# Altium PCB STM32.PcbDoc (part 10 of 10)
Units mil, origin at the board's own origin, x right, y up, seen from the top; angles counter-clockwise.
Board outline 3925 x 3925 mil, 2 copper layers (Top Layer, Bottom Layer); 152 components, 142 nets, 670 pads, 189 vias.
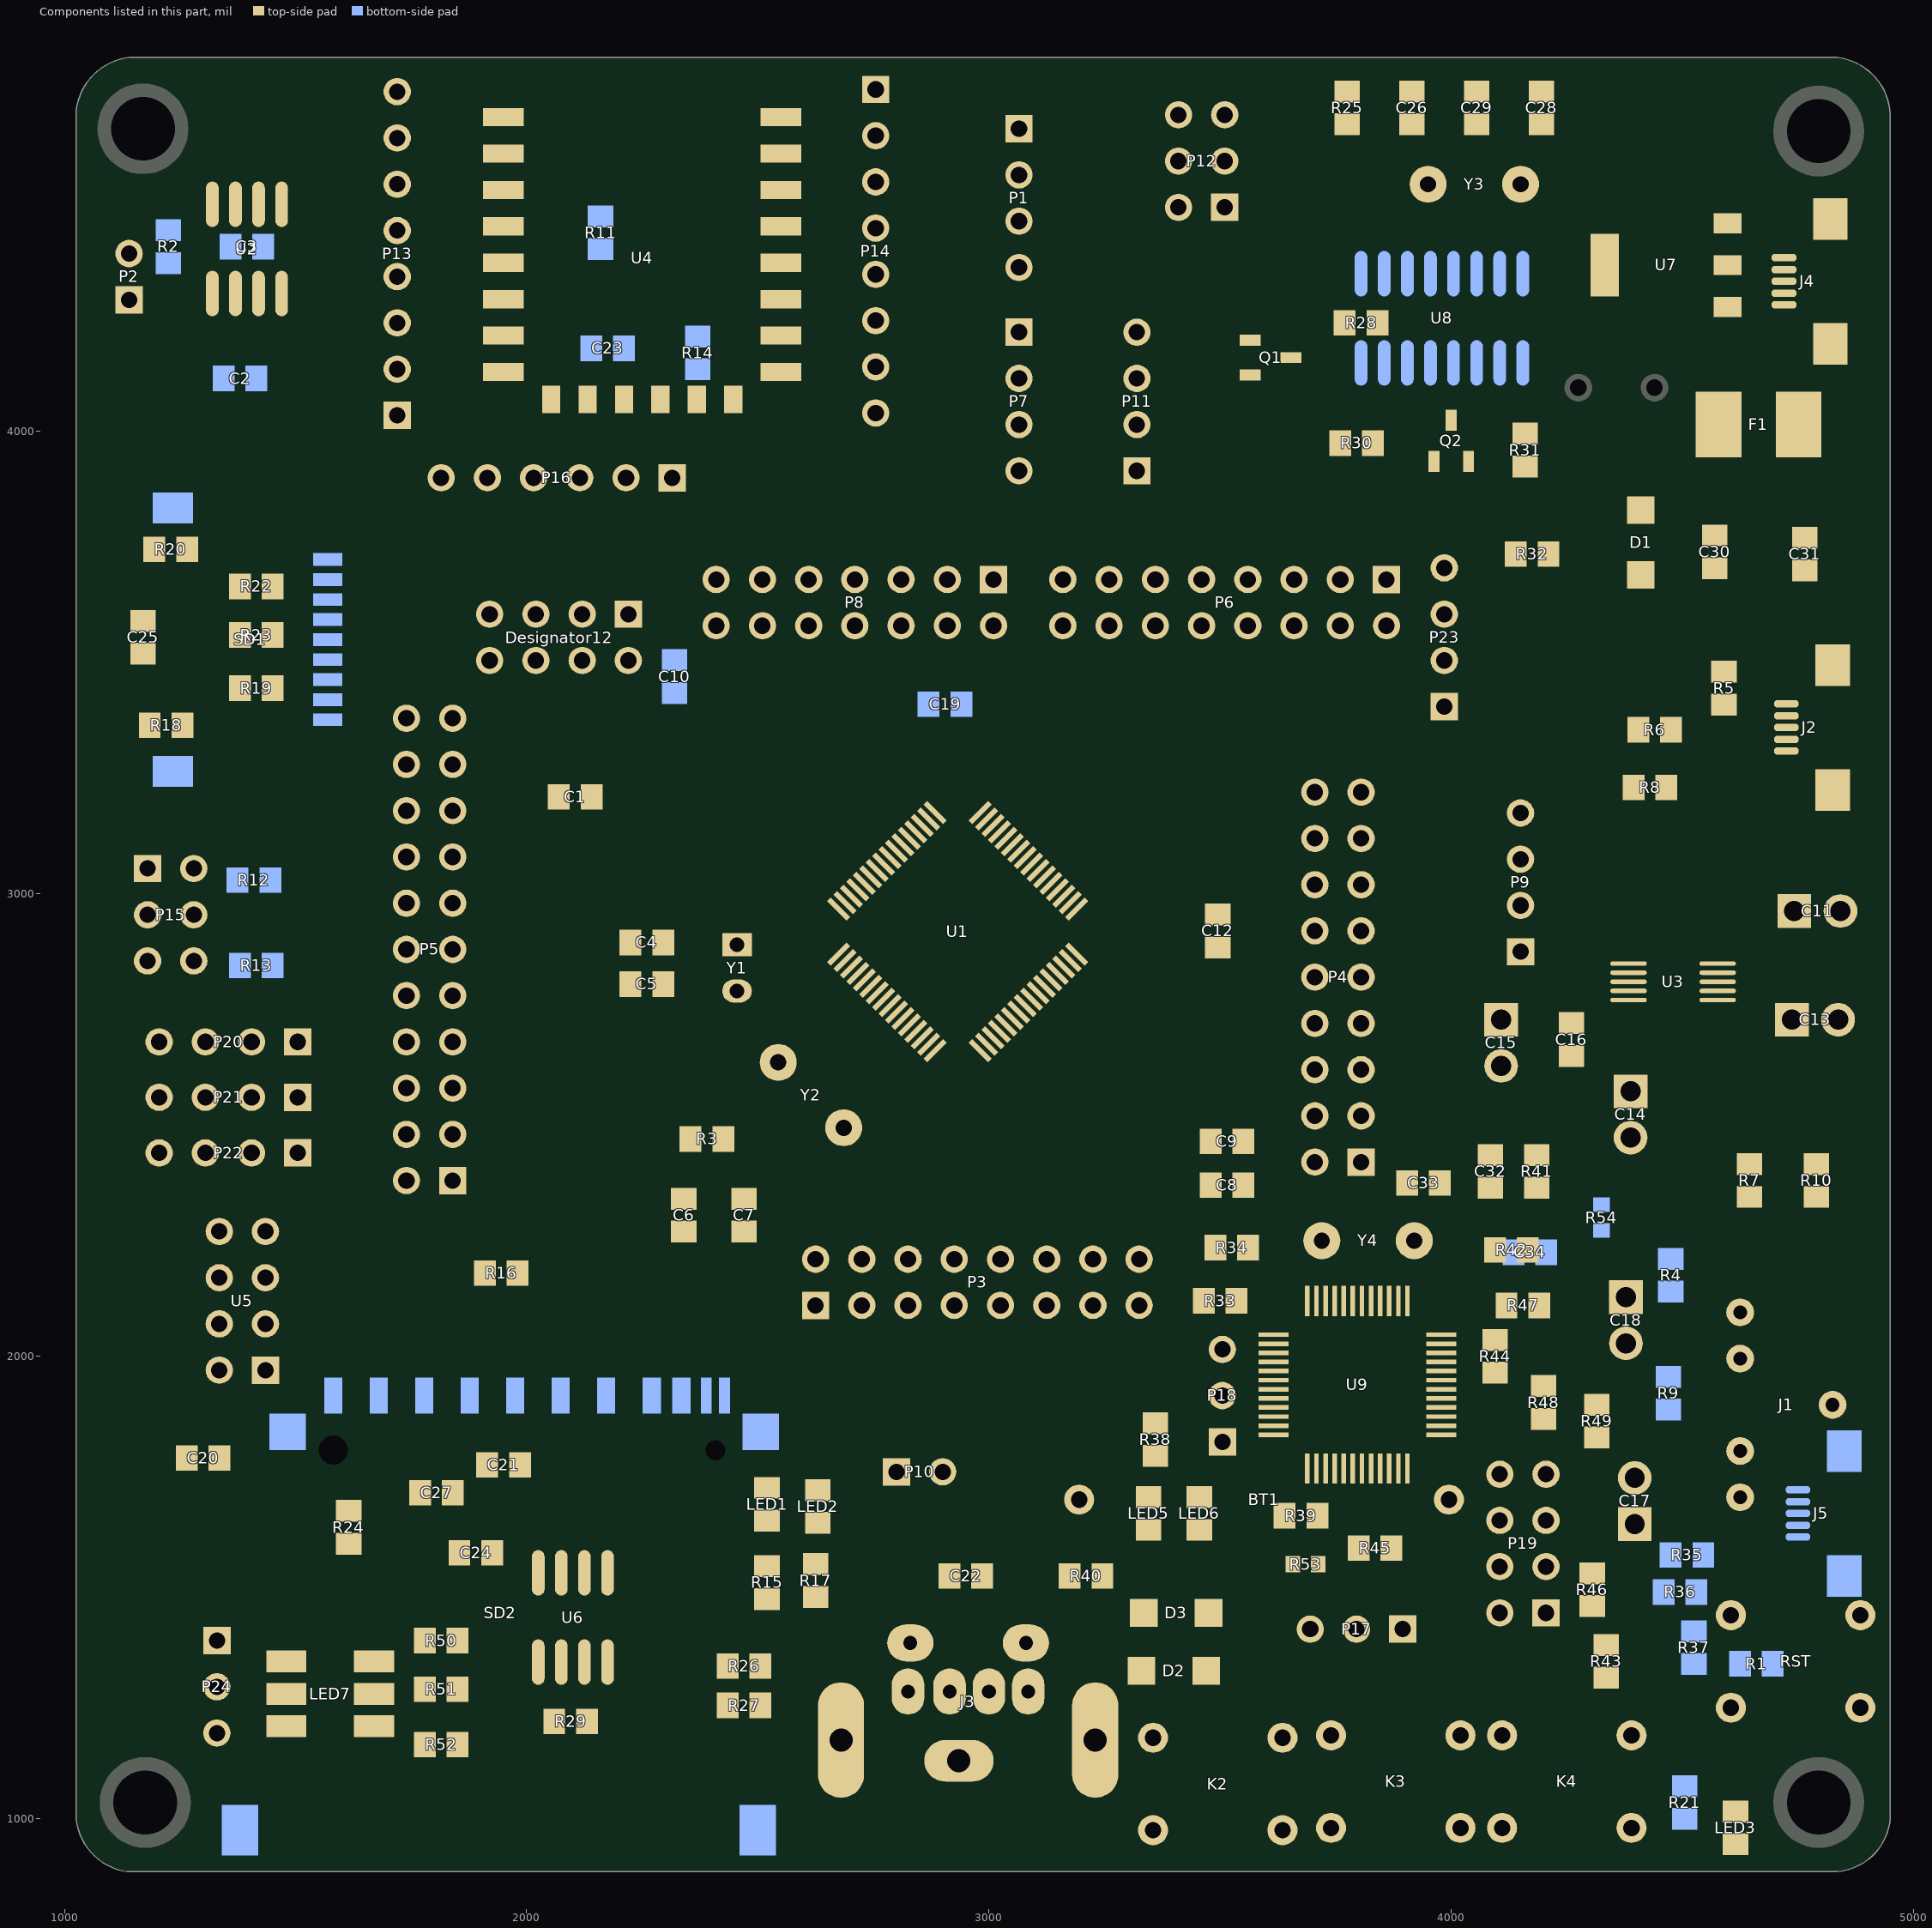
[diagram p10: the components of this part, seen from the top]

## Silkscreen, mask and mechanical layers (free items; w line width, h text height)
Top Overlay:
  lines w10: 4045,3755 4080,3755 4080,3710 ; 4050,3360 4075,3360 4080,3365 4080,3405 ; 4470,3850 4480,3840 4480,3860 4470,3850
  text "RST" at 1525,4730 h80
  text "TXD" at 2825,4730 h80
  text "SWDIO" at 2965,4710 h80 r270
  text "ESP" at 3590,4690 h80
  text "3V3" at 3130,4635 h80
  text "8266" at 3575,4635 h80
  text "ADC" at 1520,4625 h80
  text "RXD" at 2825,4620 h80
  text "TJA1050" at 1280,4565 h80
  text "STM32" at 3595,4555 h80
  text "GND" at 3130,4530 h80
  text "EN" at 1575,4515 h80
  text "IO5" at 2825,4515 h80
  text "USB-USART" at 4540,4510 h80
  text "ESP8266" at 2045,4485 h120
  text "CH340" at 3595,4455 h80
  text "SWD" at 3130,4430 h80
  text "IO16" at 1520,4425 h80
  text "IO4" at 2820,4425 h80
  text "12M" at 4095,4415 h80
  text "TX" at 3375,4370 h80
  text "RX" at 3495,4370 h80
  text "ESP12F" at 2060,4365 h120
  text "L" at 1045,4360 h80
  text "SCL" at 3130,4335 h80
  text "IO14" at 1515,4320 h80
  text "IO0" at 2820,4315 h80
  text "usart" at 3265,4280 h100
  text "H" at 1040,4255 h80
  text "IO12" at 1510,4220 h80
  text "IO2" at 2820,4220 h80
  text "GND" at 3125,4190 h80
  text "3V3" at 3385,4190 h80
  text "CAN" at 1060,4175 h80
  text "AMS1117-3.3" at 4235,4170 h80
  text "IO13" at 1510,4125 h80
  text "IO15" at 2820,4120 h80
  text "SDA" at 3125,4090 h80
  text "TX" at 3380,4090 h80
  text "8550" at 3525,4030 h80
  text "3V3" at 1515,4025 h80
  text "GND" at 2820,4020 h80
  text "SCL" at 3125,3990 h80
  text "RX" at 3380,3990 h80
  text "500" at 4830,3980 h80
  text "IIC" at 2950,3970 h100 r270
  text "mA" at 4835,3930 h80
  text "SMB" at 3125,3890 h80
  text "GND" at 3380,3890 h80
  text "1N4148" at 4310,3890 h80 r270
  text "PA12" at 3445,3885 h75 r270
  text "PA11" at 3540,3885 h75 r270
  text "PA10" at 3640,3885 h75 r270
  text "PB9" at 2390,3850 h75 r270
  text "PB8" at 2485,3850 h75 r270
  text "PB7" at 2585,3850 h75 r270
  text "PB6" at 2685,3850 h75 r270
  text "PB5" at 2795,3850 h75 r270
  text "PB4" at 2890,3850 h75 r270
  text "PB3" at 2990,3850 h75 r270
  text "A15" at 3140,3850 h75 r270
  text "A14" at 3240,3850 h75 r270
  text "A13" at 3340,3850 h75 r270
  text "PA9" at 3740,3850 h75 r270
  text "PA8" at 3840,3850 h75 r270
  text "8050" at 3930,3850 h80
  text "IO10" at 2095,3835 h80 r270
  text "CS0" at 1790,3830 h80 r270
  text "MISO" at 1895,3830 h80 r270
  text "IO9" at 1990,3830 h80 r270
  text "MOSI" at 2195,3830 h80 r270
  text "SCLK" at 2295,3830 h80 r270
  text "VCC-3.3V" at 4055,3700 h80 r270
  text "PB9" at 2385,3505 h75 r270
  text "PB8" at 2480,3505 h75 r270
  text "PB7" at 2580,3505 h75 r270
  text "PB6" at 2680,3505 h75 r270
  text "PB5" at 2790,3505 h75 r270
  text "PB4" at 2885,3505 h75 r270
  text "PB3" at 2985,3505 h75 r270
  text "A15" at 3135,3505 h75 r270
  text "A14" at 3235,3505 h75 r270
  text "A13" at 3335,3505 h75 r270
  text "PA12" at 3435,3505 h75 r270
  text "PA11" at 3530,3505 h75 r270
  text "PA10" at 3635,3505 h75 r270
  text "PA9" at 3735,3505 h75 r270
  text "PA8" at 3835,3505 h75 r270
  text "PC6" at 1915,3440 h75 r270
  text "PC7" at 2005,3440 h75 r270
  text "PC8" at 2105,3440 h75 r270
  text "PC9" at 2200,3440 h75 r270
  text "PD2" at 1563.72,3356.31 h75
  text "X" at 1480,3266.31 h80
  text "FLASH" at 1090,3265 h80
  text "0" at 1350,3265 h80
  text "PC13" at 1550,3255 h70
  text "PC13" at 1910,3250 h70
  text "I2S" at 4105,3250 h80
  text "ISP" at 1135,3215 h80
  text "1" at 1350,3215 h80
  text "0" at 1485,3215 h80
  text "PB15" at 3485,3205 h75
  text "PB15" at 3865,3205 h75
  text "SDIN" at 4210,3185 h80
  text "PC12" at 1550,3170 h70
  text "SRAM" at 1095,3165 h80
  text "1" at 1350,3165 h80
  text "1" at 1485,3165 h80
  text "PC12" at 1905,3140 h70
  text "USB-stm32" at 4580,3130 h80
  text "1" at 1220,3115 h80
  text "BT0" at 1340,3115 h80
  text "BT1" at 1475,3115 h80
  text "PB14" at 3485,3105 h75
  text "PB14" at 3865,3105 h75
  text "PC11" at 1550,3065 h70
  text "PC11" at 1910,3060 h70
  text "SCLK" at 4205,3060 h80
  text "BOOT0" at 1080,3055 h80 r270
  text "BOOT1" at 1350,3050 h80 r270
  text "STM32" at 2835,3015 h80
  text "PB13" at 3490,3005 h75
  text "PB13" at 3870,3005 h75
  text "PC10" at 1550,2960 h70
  text "LRCK" at 4210,2960 h80
  text "PC10" at 1910,2955 h70
  text "GD32" at 2850,2920 h80
  text "B12" at 3535,2905 h75
  text "PB12" at 3870,2905 h75
  text "MCLK" at 4210,2870 h80
  text "PC5" at 1565,2860 h75
  text "PC5" at 1915,2855 h75
  text "F103Rxxx" at 2775,2835 h80
  text "PC6" at 4210,2825 h80
  text "B11" at 3530,2805 h75
  text "PB11" at 3870,2805 h75
  text "PC4" at 1565,2770 h75
  text "PC4" at 1915,2765 h75
  text "GND" at 1095,2755 h75 r270
  text "0" at 1205,2745 h80
  text "PB10" at 3490,2705 h75
  text "PB10" at 3870,2700 h75
  text "CS4344" at 4380,2680 h80
  text "PC3" at 1565,2665 h75
  text "PC3" at 1915,2660 h75
  text "3V3" at 1095,2615 h80 r270
  text "PB2" at 3870,2605 h75
  text "PB2" at 3530,2600 h75
  text "PC2" at 1565,2565 h75
  text "PC2" at 1915,2560 h75
  text "PB1" at 3530,2510 h75
  text "PB1" at 3870,2500 h75
  text "PC1" at 1565,2465 h75
  text "PC1" at 1915,2460 h75
  text "8M" at 2485,2450 h80
  text "PB0" at 3600,2440 h75 r270
  text "PB0" at 3875,2420 h75
  text "PA5" at 3105,2395 h75 r270
  text "PA6" at 3205,2395 h75 r270
  text "PA7" at 3305,2395 h75 r270
  text "PA0" at 2590,2390 h75 r270
  text "PA1" at 2705,2390 h75 r270
  text "PA2" at 2805,2390 h75 r270
  text "PA3" at 2905,2390 h75 r270
  text "PA4" at 3005,2390 h75 r270
  text "5V" at 1060,2375 h80
  text "PC0" at 1560,2360 h75
  text "PC0" at 1910,2355 h75
  text "IRQ" at 1160,2245 h80
  text "MISO" at 1510,2245 h80
  text "8M" at 3765,2235 h80
  text "VOICE" at 4665,2190 h80
  text "MOSI" at 1105,2145 h80
  text "SCK" at 1505,2145 h80
  text "NRF24L01" at 1645,2065 h80
  text "CE" at 1505,2045 h80
  text "CS" at 1185,2040 h80
  text "PA5" at 3105,2040 h75 r270
  text "PA6" at 3205,2040 h75 r270
  text "PA7" at 3305,2040 h75 r270
  text "PA0" at 2590,2035 h75 r270
  text "PA1" at 2705,2035 h75 r270
  text "PA2" at 2805,2035 h75 r270
  text "PA3" at 2905,2035 h75 r270
  text "PA4" at 3005,2035 h75 r270
  text "G" at 3400,1995 h80
  text "stm32" at 3690,1990 h80
  text "GND" at 1505,1945 h80
  text "3V3" at 1150,1940 h80
  text "f103" at 3720,1930 h80
  text "T" at 3405,1895 h80
  text "c8t6" at 3720,1860 h80
  text "GND" at 2690,1825 h80
  text "DAC" at 2865,1825 h80
  text "R" at 3405,1795 h80
  text "SWC" at 3905,1735 h80
  text "SWD" at 3905,1605 h80
  text "USB-stlink" at 4605,1535 h80
  text "GND" at 3910,1520 h80
  text "SWD" at 3625,1480 h35
  text "SWC" at 3740,1480 h35
  text "3V3" at 3980,1475 h80 r270
  text "LED5050" at 1410,1405 h80
  text "FLASH" at 2215,1400 h80
  text "NRST" at 4095,1330 h80
  text "GND" at 3850,1305 h35
  text "SWIM" at 4095,1280 h80
  text "POWER" at 4460,1070 h80
  text "PS2" at 2520,950 h80
Bottom Overlay:
  text "USB-stlink" at 4710,1905 h80 r90

## Text inside footprints (layer, text, board x,y; h text height)
C13: Top Overlay "+" at 4697,2765 h59.06
C14: Top Overlay "+" at 4425,2613 h59.06 r270
C15: Top Overlay "+" at 4145,2768 h59.06 r270
C17: Top Overlay "+" at 4360,1597 h59.06 r90
C18: Top Overlay "+" at 4415,2150 h59.06 r270
U5: Top Overlay "2" at 1355,1870 h50 r90; Top Overlay "1" at 1455,1890 h50 r90; Top Overlay "7" at 1455,2330 h50 r90; Top Overlay "8" at 1355,2330 h50 r90